# EAGLE board Probatio5Pins_v0.0.2 (EAGLE 7.4.0)
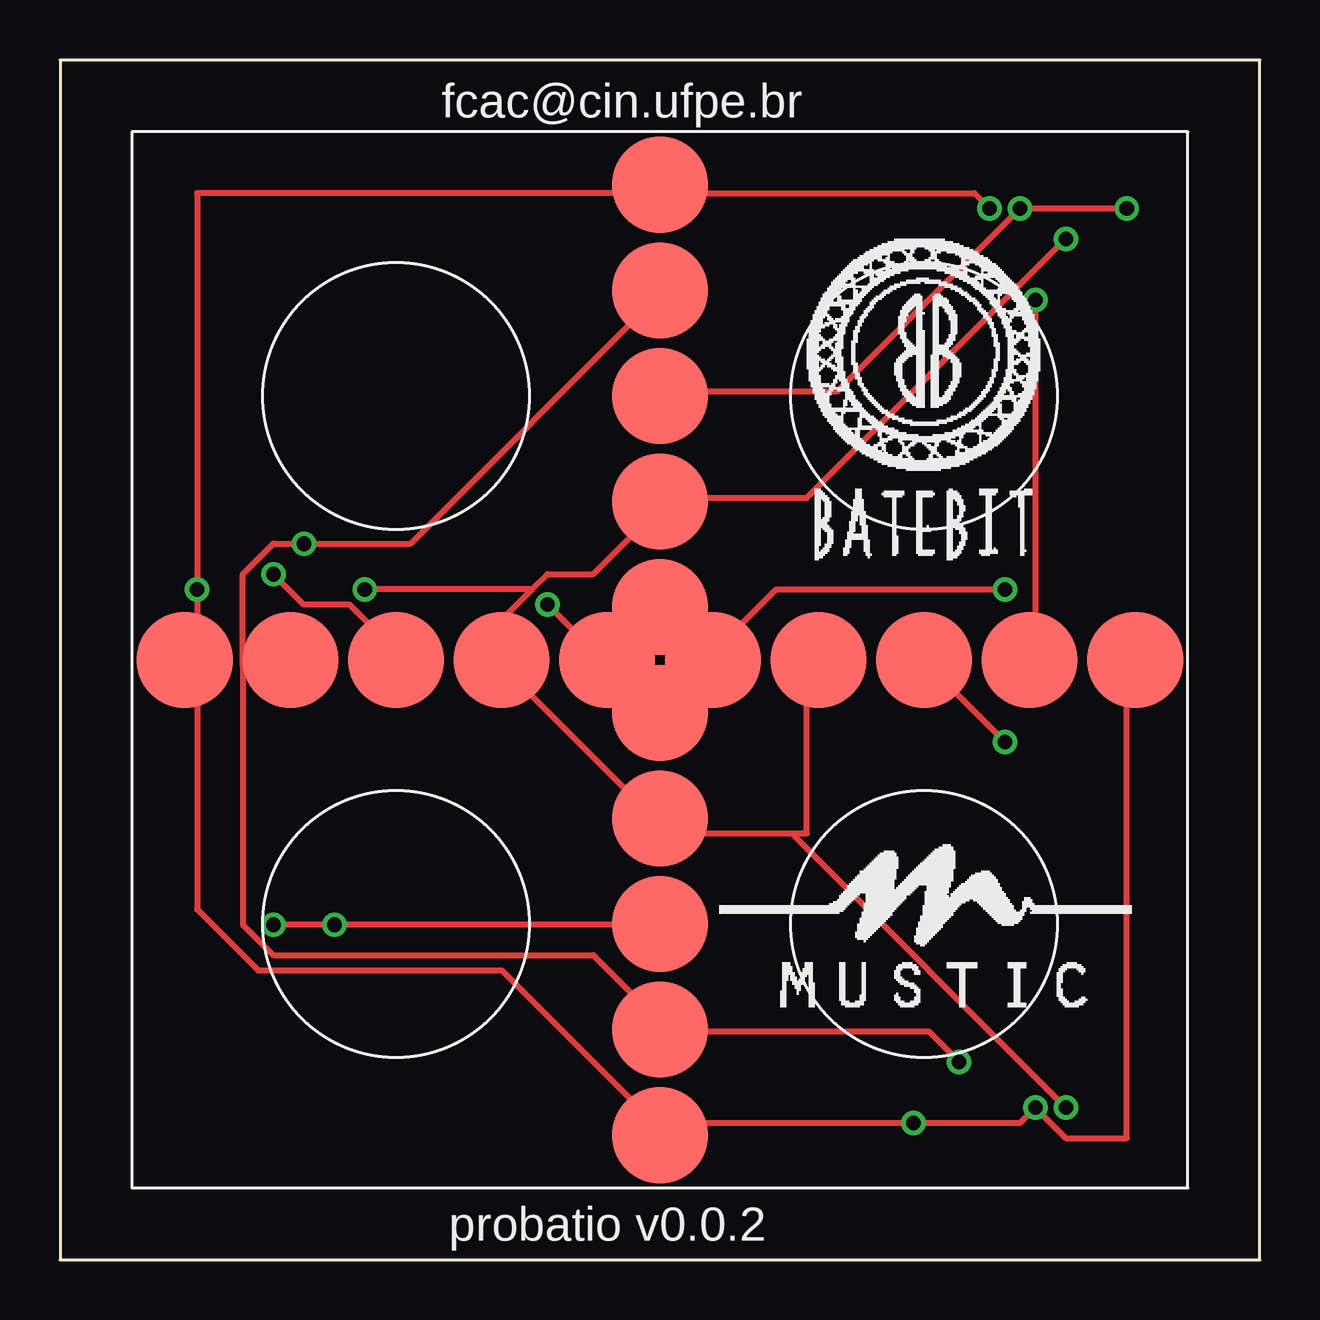
[diagram p0: board, top side]
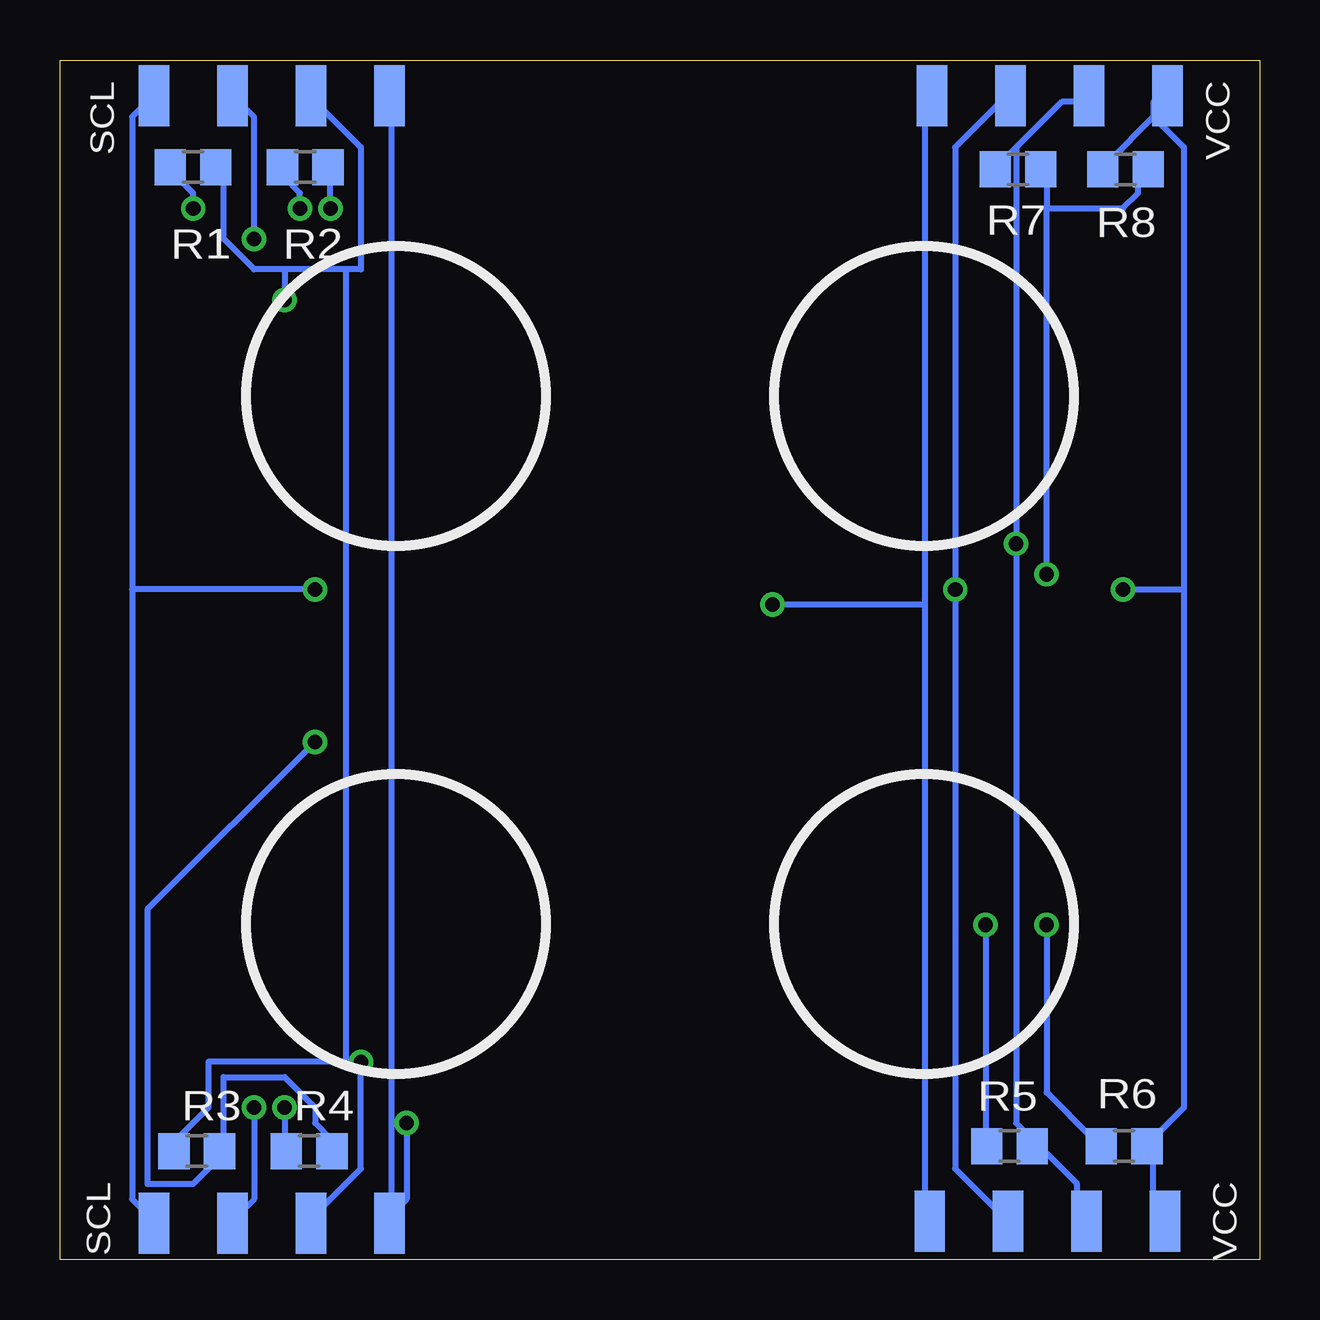
[diagram p1: board, bottom side, seen from below]

Size 50 x 50 mm. Coordinates in mm from the lower left corner, seen from the top.
Outline: 0,0 50,0 50,50 0,50 0,0
Copper layers (1*16): Top 0.035mm / dielectric 1.5mm / Bottom 0.035mm
Design rules "default": minimum track width 10mil, minimum drill 24mil, track to track 8mil, track to pad 8mil, pad to pad 8mil, via to via 8mil, smd to smd 8mil, copper to edge 40mil, drill to drill 8mil, minimum pad ring 10mil, minimum via ring 8mil, stop-mask expansion 4mil, vias tented up to drill 0mil, thermal gap 10mil

## Footprints (pad centres in the part's own frame; a part is rotated, then mirrored left to right if it is on the bottom)
CONNECTORS_PIN = smd 4 x 4: 5V_EAST 44.801,24.999; 5V_NORTH 24.999,44.801; 5V_SOUTH 24.999,5.199; 5V_WEST 5.199,24.999; GND_EAST 40.399,24.999; GND_NORTH 24.999,40.399; GND_SOUTH 24.999,9.599; GND_WEST 9.599,24.999; OUT_EAST 35.999,24.999; OUT_NORTH 24.999,35.999; OUT_SOUTH 24.999,14; OUT_WEST 14,24.999; SDA_EAST 31.6,24.999; SDA_NORTH 24.999,31.6; SDA_SOUTH 24.999,18.4; SDA_WEST 18.4,24.999; SLC_EAST 27.201,24.999; SLC_NORTH 24.999,27.201; SLC_SOUTH 24.999,22.799; SLC_WEST 22.799,24.999
R0805 = smd 1.3 x 1.5: 1 -0.95,0; 2 0.95,0
FOUR_SIDE_PINS = smd 2.54 x 1.27: 5V 1.27,1.08; GND 1.27,4.35; SCL 1.27,10.89; SDA 1.27,7.62

## Placement (x,y rotation side)
CENTER1  CONNECTORS_PIN_DEVICE  [CONNECTORS_PIN]  0,0 0 top
R1  [R0805]  44.46,45.54 0 bottom
R2  [R0805]  39.78,45.54 0 bottom
R3  [R0805]  44.3,4.54 0 bottom
R4  [R0805]  39.62,4.54 0 bottom
R5  [R0805]  10.44,4.74 0 bottom
R6  [R0805]  5.66,4.74 0 bottom
R7  [R0805]  10.08,45.44 0 bottom
R8  [R0805]  5.6,45.44 0 bottom
U$1  FOUR_SIDE_PINS  [FOUR_SIDE_PINS]  35.19,0.27 90 bottom
U$2  FOUR_SIDE_PINS  [FOUR_SIDE_PINS]  35.19,47.24 90 bottom
U$3  FOUR_SIDE_PINS  [FOUR_SIDE_PINS]  2.78,47.24 90 bottom
U$4  FOUR_SIDE_PINS  [FOUR_SIDE_PINS]  2.87,0.34 90 bottom

## Library data of the parts
CENTER1 = probatioBase5Pins_0.0.2
R1-R8 = resistor
U$1-U$4 = probatio_fourSidePins

## Nets
GND: CENTER1.GND_EAST CENTER1.GND_NORTH CENTER1.GND_SOUTH CENTER1.GND_WEST R1.2 R3.1 R5.2 R7.1 U$1.GND U$2.GND U$3.GND U$4.GND
N$3: CENTER1.OUT_EAST R3.2 R4.2
N$4: CENTER1.SDA_EAST CENTER1.SDA_NORTH CENTER1.SDA_SOUTH CENTER1.SDA_WEST U$1.SDA U$2.SDA U$3.SDA U$4.SDA
N$6: CENTER1.5V_EAST CENTER1.5V_NORTH CENTER1.5V_SOUTH CENTER1.5V_WEST R2.2 R4.1 R6.2 R8.1 U$1.5V U$2.5V U$3.5V U$4.5V
N$7: CENTER1.OUT_NORTH R1.1 R2.1
N$10: CENTER1.SLC_EAST CENTER1.SLC_NORTH CENTER1.SLC_SOUTH CENTER1.SLC_WEST U$1.SCL U$2.SCL U$3.SCL U$4.SCL
N$15: CENTER1.OUT_WEST R7.2 R8.2
N$18: CENTER1.OUT_SOUTH R5.1 R6.1

## Tracks (layer width: path | path; a pad name or v marks a point on that pad's centre or on a via)
GND  (via drill 0.61)
  Top 0.254: v40.64,40.01 40.64,25.4 CENTER1.GND_EAST | 7.62,24.77 7.62,13.97 8.89,12.7 22.23,12.7 24.77,10.16 CENTER1.GND_SOUTH 25.4,9.53 36.2,9.53 v37.47,8.26 | 7.62,24.77 9.53,24.77 CENTER1.GND_WEST 7.62,24.77 | 7.62,24.77 7.62,28.57 8.89,29.84 v10.16,29.84 14.61,29.84 24.77,40.01 CENTER1.GND_NORTH
  Bottom 0.254: 38.1,8.26 v37.47,8.26 37.47,3.81 39.37,1.91 U$1.GND | 38.1,8.26 43.81,8.26 43.81,6.35 45.09,5.08 R3.1 | 38.1,41.27 37.47,41.27 37.47,46.35 39.37,48.26 U$2.GND | 38.1,41.27 40.64,41.27 | 40.64,41.27 41.91,41.27 43.18,42.55 43.18,45.09 R1.2 | 40.64,41.27 v40.64,40.01 | 38.1,41.27 38.1,8.26 | U$4.GND 7.62,1.91 7.62,3.17 8.89,4.45 R5.2 9.53,5.08 10.16,5.71 v10.16,29.84 10.16,46.35 | 10.16,46.35 8.26,48.26 7.62,48.26 U$3.GND | 10.16,46.35 10.79,45.72 R7.1
N$3  (via drill 0.61)
  Top 0.254: v39.37,21.59 36.2,24.77 CENTER1.OUT_EAST
  Bottom 0.254: R4.2 38.73,5.08 39.37,5.71 39.37,6.35 40.64,7.62 43.18,7.62 43.18,5.08 R3.2 43.81,4.45 43.81,3.81 44.45,3.17 46.35,3.17 46.35,14.61 v39.37,21.59
N$4  (via drill 0.61)
  Top 0.254: v41.91,42.55 31.11,31.75 25.4,31.75 CENTER1.SDA_NORTH 24.77,31.11 22.23,28.57 20.32,28.57 19.68,27.94 | 30.48,17.78 v41.91,6.35 | 30.48,17.78 25.4,17.78 CENTER1.SDA_SOUTH 24.77,18.41 18.41,24.77 CENTER1.SDA_WEST 18.41,25.4 18.41,26.67 19.68,27.94 | 30.48,17.78 31.11,17.78 31.11,24.77 CENTER1.SDA_EAST | 19.68,27.94 v12.7,27.94
  Bottom 0.254: U$4.SDA 10.79,1.91 12.7,3.81 v12.7,27.94 12.7,46.35 10.79,48.26 U$3.SDA | v41.91,42.55 41.91,47.62 42.55,48.26 U$2.SDA | v41.91,6.35 41.91,2.54 42.55,1.91 U$1.SDA
N$6  (via drill 0.61)
  Top 0.254: CENTER1.5V_EAST 44.45,24.77 44.45,5.08 41.91,5.08 v40.64,6.35 40.01,5.71 v35.56,5.71 25.4,5.71 CENTER1.5V_SOUTH 24.77,5.71 18.41,12.06 8.26,12.06 5.71,14.61 5.71,24.77 CENTER1.5V_WEST 5.71,25.4 v5.71,27.94 5.71,44.45 24.77,44.45 CENTER1.5V_NORTH 25.4,44.45 38.1,44.45 v38.73,43.81
  Bottom 0.254: U$4.5V 4.45,1.91 4.45,4.45 R6.2 4.45,5.08 3.17,6.35 3.17,27.94 | 4.45,47.62 6.35,45.72 R8.1 | 4.45,47.62 4.45,48.26 U$3.5V 4.45,47.62 | 3.17,27.94 3.17,46.35 4.45,47.62 | 36.2,1.91 36.2,48.26 U$2.5V | v40.64,6.35 40.64,5.08 R4.1 | v38.73,43.81 38.73,45.09 R2.2 | 36.2,1.91 35.56,2.54 v35.56,5.71 | 36.2,1.91 U$1.5V | v5.71,27.94 3.17,27.94
N$7  (via drill 0.61)
  Top 0.254: CENTER1.OUT_NORTH 25.4,36.2 32.38,36.2 v40.01,43.81 v44.45,43.81
  Bottom 0.254: v40.01,43.81 40.01,44.45 40.64,45.09 R2.1 | v44.45,43.81 44.45,44.45 45.09,45.09 R1.1
N$10  (via drill 0.61)
  Top 0.254: CENTER1.SLC_SOUTH 25.4,22.86 27.3,24.77 CENTER1.SLC_EAST | CENTER1.SLC_EAST 26.67,25.4 25.4,26.67 CENTER1.SLC_NORTH 24.77,26.67 24.13,26.67 22.86,25.4 CENTER1.SLC_WEST 22.23,25.4 v20.32,27.3 | v39.37,27.94 29.84,27.94 27.3,25.4 CENTER1.SLC_EAST
  Bottom 0.254: 46.99,27.94 46.99,47.62 46.35,48.26 U$2.SCL | 46.99,27.94 46.99,2.54 46.35,1.91 U$1.SCL | 13.97,27.3 13.97,48.26 U$3.SCL | 13.97,27.3 13.97,1.91 U$4.SCL | 13.97,27.3 v20.32,27.3 | v39.37,27.94 46.99,27.94
N$15  (via drill 0.61)
  Top 0.254: v8.89,28.57 10.16,27.3 12.06,27.3 13.97,25.4 CENTER1.OUT_WEST
  Bottom 0.254: 8.89,43.81 5.71,43.81 5.08,44.45 5.08,45.09 R8.2 | 8.89,43.81 8.89,45.09 R7.2 | v8.89,28.57 8.89,43.81
N$18  (via drill 0.61)
  Top 0.254: v8.89,13.97 v11.43,13.97 24.77,13.97 CENTER1.OUT_SOUTH
  Bottom 0.254: v8.89,13.97 8.89,6.99 6.99,5.08 R6.1 | v11.43,13.97 11.43,5.08 R5.1

## Text on the board
tPlace: fcac@cin.ufpe.br | probatio v0.0.2
bPlace: VCC | SCL | VCC | SCL